# Altium PCB Race_Province.pcbdoc (part 2 of 2)
Units mil, origin at the board's own origin, x right, y up, seen from the top; angles counter-clockwise.
Board outline 6815.59 x 4255 mil, 2 copper layers (Top Layer, Bottom Layer); 128 components, 101 nets, 458 pads, 264 vias.
Unrouted connection lines stored in the file: 95.
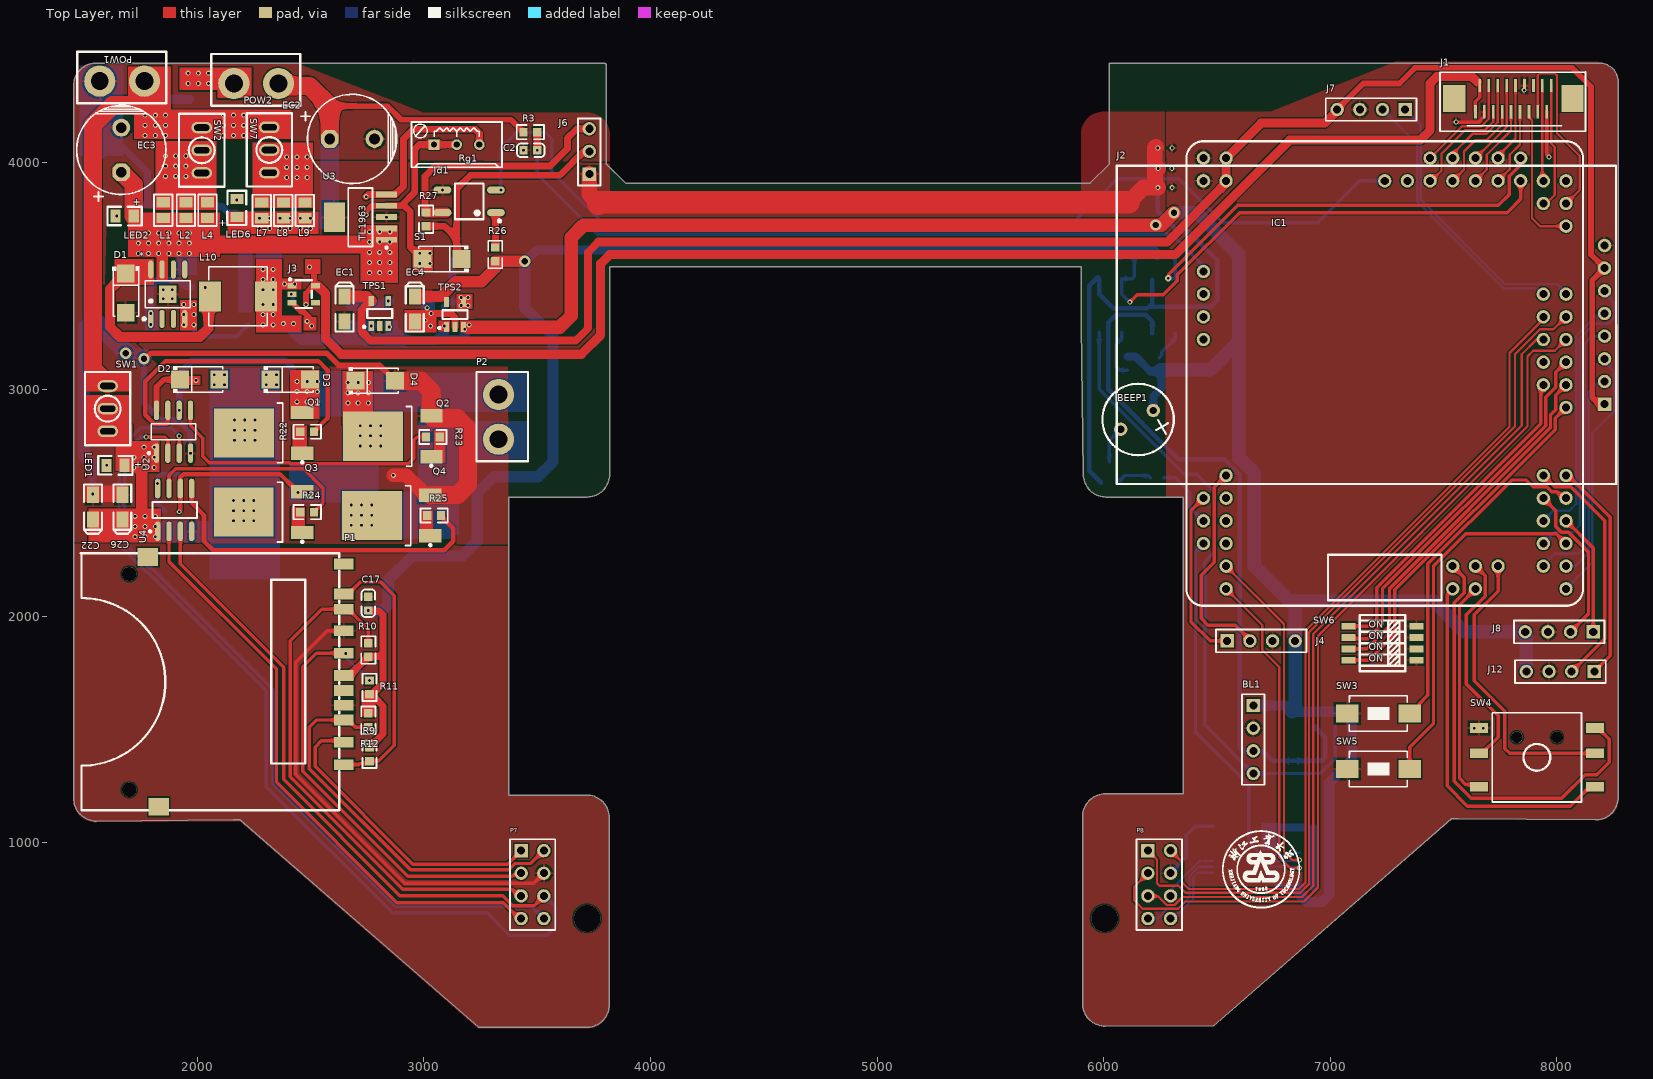
[diagram p0: Top Layer view]

## Other copper (continued)
Bottom Layer: (continued)
  rectangle net VCC5.0-ALL: 2730,3250 2785,3305
  rectangle net NetF1_2: 2090,4285 2240,4420.2
  rectangle net NetF1_2: 1922,4320 2240,4420.2
  rectangle net NetR18_1: 6705,1050 6885,1085
  rectangle net NetR18_1: 6696.91,965 6775,1086.16
  rectangle net VCC11.2: 2720,3470 2885,3725
  rectangle net VCC5.0-ALL: 2355,3440 2460,3490
  rectangle net GND: 2180,3340 2245,3640
  rectangle net VCC5.0-ALL: 2330,3250 2460,3325
  rectangle net VCC5.0-ALL: 2260,3250 2375,3660
  rectangle net Net*_4: 1925,3260 2000,3395
  rectangle net VCC11.2_Edge: 2235,3685 2535,3785
  rectangle net Net*_1: 1770,3260 1829.1,3360
  rectangle net VCC11.2: 1905,3505 2000,3665
  rectangle net VCC11.2: 1695,3585 2000,3710
  rectangle net NetL7_1: 2245,3800 2510,4090
  rectangle net NetL1_1: 1815,3859.65 2085.75,4095
  rectangle net POWER: 1720,4105 2415,4235

## Silkscreen, mask and mechanical layers (free items; w line width, h text height)
Top Overlay:
  drawing of 4671 lines, arcs and shapes, not listed
Top Solder:
  drawing of 4671 lines, arcs and shapes, not listed
  text "浙工大鸿泉-Dean" at 3985,3675 h300
  text "2023/3/6" at 4745,3575 h60
  text "许景皓" at 2977.47,2021.92 h120
  text "张 磊" at 2974.13,1852.06 h120
  text "夏均鑫" at 2974.07,1706.39 h120
  text "郑瑞涛" at 2972.4,1551.85 h120
  text "何昌蔓" at 2976.47,1374.12 h120
Mechanical 1:
  lines w10: 1455,1195 ccw(c1555,1195) 1555,1095 2160,1100 2190,1100 3240.68,186.03 3718.22,185 ccw(c3718.22,285) 3818.22,285 3818.22,1110 ccw(c3718.22,1110) 3718.22,1210 3375,1210 3375,2525 3720,2525 ccw(c3720,2625) 3820,2625 3820,3285 3820,3540 5900,3540 5900,3285 5910,2625 ccw(c6010,2625) 6010,2525 6350,2525 6350,1215 6006.78,1215 ccw(c6006.78,1115) 5906.78,1115 5906.78,290 ccw(c6006.78,290) 6006.78,190 6484.32,191.03 7535,1105 7565,1105 8170,1100 ccw(c8170,1200) 8270,1200 8270,4345 ccw(c8185,4355) 8195,4440 6025,4440 6025,3995 5940,3910 5925,3910 3890,3910 3805,3995 3805,4435 3800,4440 2440,4440 1555,4440 ccw(c1555,4340) 1455,4340 1455,1195
Mechanical 13:
  lines w10: 8112.52,3736.34 8112.52,4287.52

## Text inside footprints (layer, text, board x,y; h text height)
LED1: Top Overlay "+" at 1723.25,2680 h30 r180
LED2: Top Overlay "+" at 1715,3840 h30 r180
LED6: Top Overlay "+" at 2125,3750 h30 r90
SW6: Top Overlay "ON" at 7169.46,1897.79 h30; Top Overlay "ON" at 7169.46,1947.79 h30; Top Overlay "ON" at 7169.46,1847.79 h30; Top Overlay "ON" at 7169.46,1797.79 h30